# EAGLE board Rocket Club Drag Flaps (EAGLE 7.5.0)
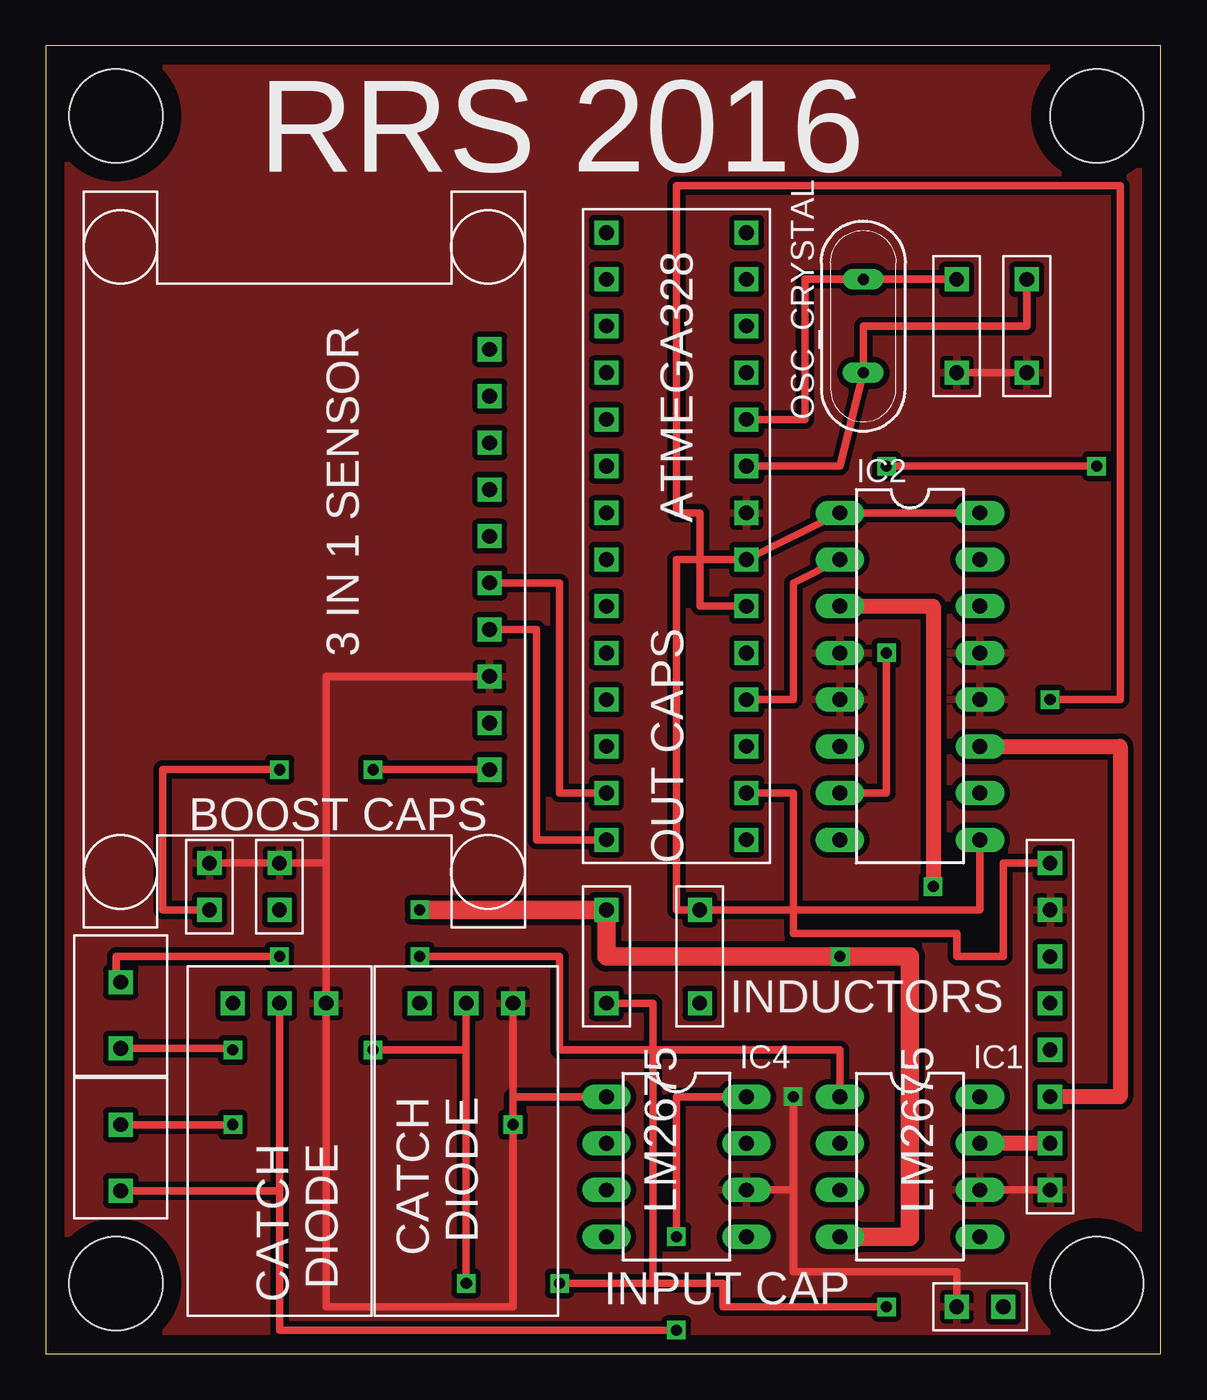
[diagram p0: board, top side]
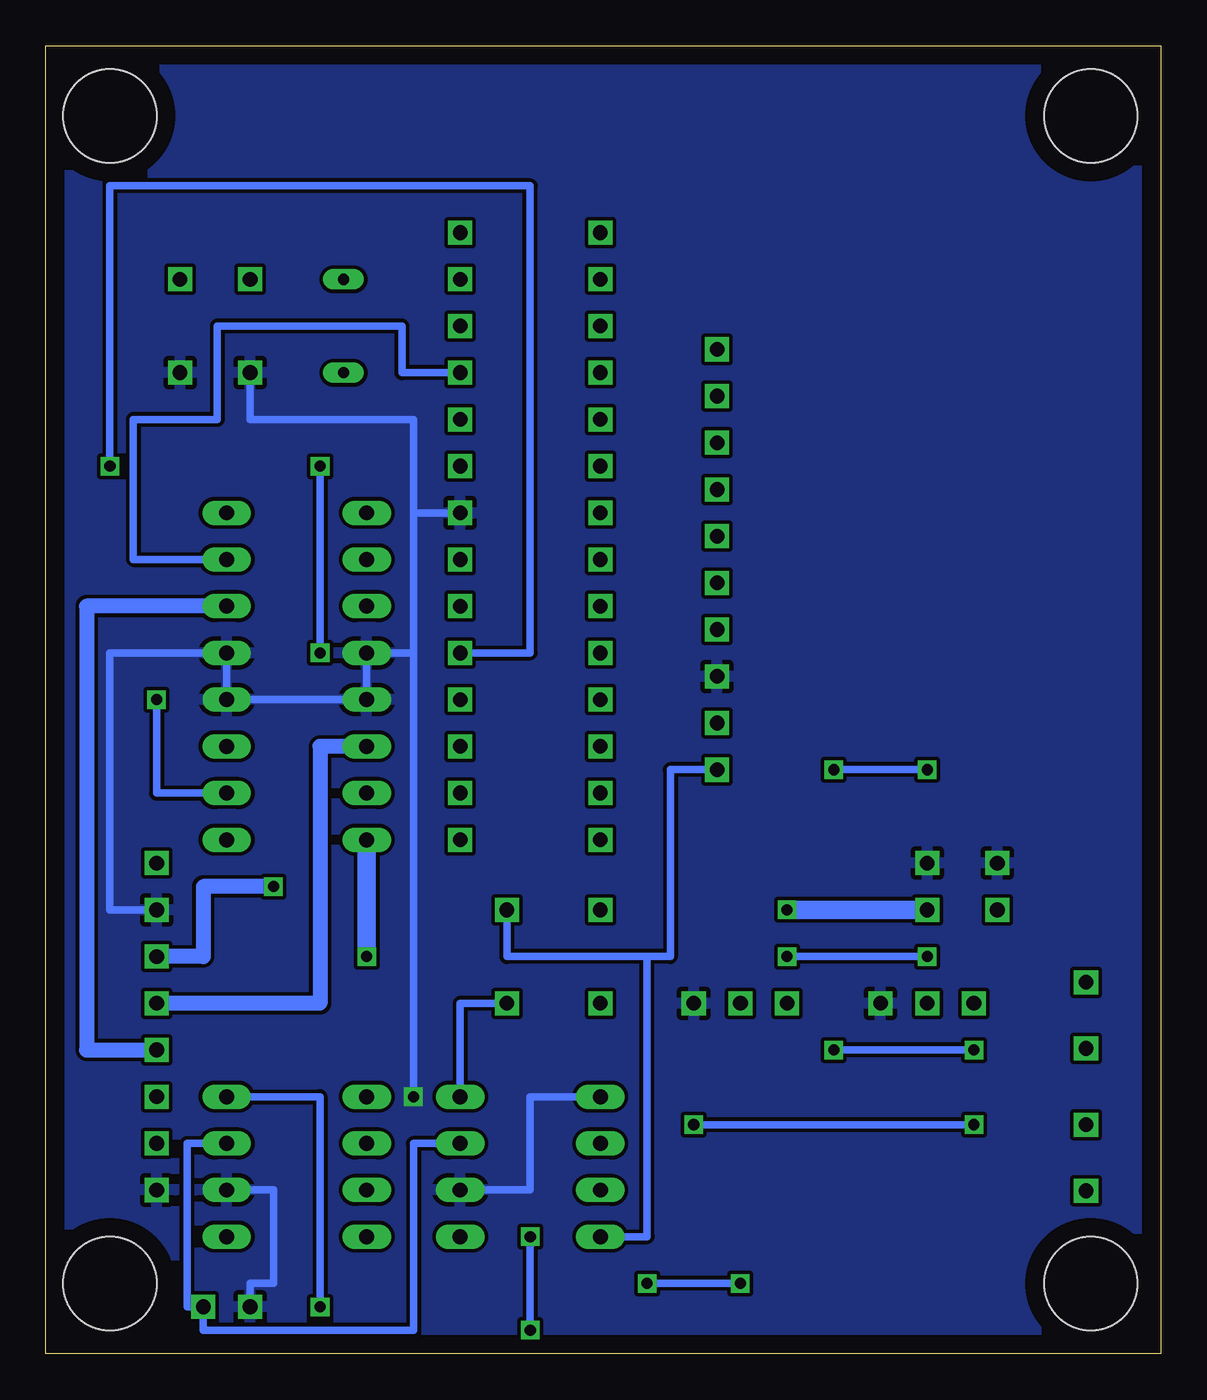
[diagram p1: board, bottom side, seen from below]

Size 60.63 x 71.11 mm. Coordinates in mm from the lower left corner, seen from the top.
Outline: 0,0 60.63,0 60.63,71.11 0,71.11 0,0
Copper layers (1*16): Top 0.035mm / dielectric 1.5mm / Bottom 0.035mm
Design rules "default": minimum track width 10mil, minimum drill 24mil, track to track 8mil, track to pad 8mil, pad to pad 8mil, via to via 8mil, smd to smd 8mil, copper to edge 40mil, drill to drill 8mil, minimum pad ring 10mil, minimum via ring 8mil, stop-mask expansion 4mil, vias tented up to drill 0mil, thermal gap 10mil
Holes 5.08 mm at 3.81,67.31 57.15,67.31 57.15,3.81 3.81,3.81

## Footprints (pad centres in the part's own frame; a part is rotated, then mirrored left to right if it is on the bottom)
BOOST_CAP = drill 0.8 square: P$1 0,0; P$2 0,-3.592
CATCH_DIODOE = drill 0.8 square: P$1 0,2.54; P$2 0,0; P$3 0,-2.54
DIL08 = drill 0.813 long: 1 -3.81,-3.81; 2 -1.27,-3.81; 3 1.27,-3.81; 4 3.81,-3.81; 5 3.81,3.81; 6 1.27,3.81; 7 -1.27,3.81; 8 -3.81,3.81
DIL16 = drill 0.813 long: 1 -8.89,-3.81; 2 -6.35,-3.81; 3 -3.81,-3.81; 4 -1.27,-3.81; 5 1.27,-3.81; 6 3.81,-3.81; 7 6.35,-3.81; 8 8.89,-3.81; 9 8.89,3.81; 10 6.35,3.81; 11 3.81,3.81; 12 1.27,3.81; 13 -1.27,3.81; 14 -3.81,3.81; 15 -6.35,3.81; 16 -8.89,3.81
AXIAL_2 = drill 0.8 square: P$1 -2.54,0; P$2 2.54,0
QS = drill 0.61 long: 1 -2.54,0; 2 2.54,0
SCREW_ONESIDE = drill 0.8 square: P$1 0,0; P$2 0,-2.54; P$3 0,-5.08; P$4 0,-7.62; P$5 0,-10.16; P$6 0,-12.7; P$7 0,-15.24; P$8 0,-17.78
LSM303DLHC/LSGD20H/BMP180 = drill 0.8 square: 3VO -8.89,-5.08; GINT 1.27,-5.08; GND -6.35,-5.08; GRDY 3.81,-5.08; LIN1 6.35,-5.08; LIN2 8.89,-5.08; LRDY 11.43,-5.08; SCL -3.81,-5.08; SDA -1.27,-5.08; VIN -11.43,-5.08
ATMEGA328 = drill 0.8 square: 0_RX 0,-2.54; 1_TX 0,-5.08; 2 0,-7.62; 3 0,-10.16; 4 0,-12.7; 5 0,-25.4; 6 0,-27.94; 7 0,-30.48; 8 0,-33.02; 9 7.62,-33.02; 10_SS 7.62,-30.48; 11_MOSI 7.62,-27.94; 12_MISO 7.62,-25.4; 13_SCK 7.62,-22.86; A0 7.62,-12.7; A1 7.62,-10.16; A2 7.62,-7.62; A3 7.62,-5.08; AREF 7.62,-17.78; GND 0,-17.78; GND_2 7.62,-15.24; OSC1 0,-20.32; OSC2 0,-22.86; RESET 0,0; SCL 7.62,0; SDA 7.62,-2.54; VCC 0,-15.24; VCC_2 7.62,-20.32
AXIAL_2_REAL = drill 0.8 square: P$1 -1.27,0; P$2 1.27,0

## Placement (x,y rotation side)
BOOST_CAP_1  10nF  [BOOST_CAP]  4.06,12.45 0 top
BOOST_CAP_2  10nF  [BOOST_CAP]  4.06,20.19 0 top
CATCH_DIODE_1  CATCH_DIODE  [CATCH_DIODOE]  12.7,19.05 90 top
CATCH_DIODE_2  CATCH_DIODE  [CATCH_DIODOE]  22.86,19.05 90 top
IC1  [DIL08]  46.99,10.16 270 top
IC2  [DIL16]  46.99,36.83 270 top
IC4  [DIL08]  34.29,10.16 270 top
OSC_CAP_0  22pF  [AXIAL_2]  49.53,55.88 270 top
OSC_CAP_1  22pF  [AXIAL_2]  53.34,55.88 270 top
OSC_CRYSTAL  16MHz  [QS]  44.45,55.88 90 top
U$1  SCREW_ONESIDE  [SCREW_ONESIDE]  54.61,26.67 0 top
U$2  AXIAL_3  [AXIAL_2]  35.56,21.59 270 top
U$3  LSM303DLHC/LSGD20H/BMP180  [LSM303DLHC/LSGD20H/BMP180]  19.05,43.18 90 top
U$4  ATMEGA328  [ATMEGA328]  38.1,27.94 180 top
U$5  AXIAL_2  [AXIAL_2_REAL]  8.89,25.4 90 top
U$6  AXIAL_2  [AXIAL_2_REAL]  12.7,25.4 90 top
U$7  AXIAL_3  [AXIAL_2]  30.48,21.59 270 top
VIN_CAP1  330 uF  [AXIAL_2_REAL]  50.8,2.54 0 top

## Library data of the parts
BOOST_CAP_1 BOOST_CAP_2 CATCH_DIODE_1 CATCH_DIODE_2 OSC_CAP_0 OSC_CAP_1 U$1-U$7 VIN_CAP1 = ROCKET CLUB
IC1 IC2 IC4 = ic-package
OSC_CRYSTAL = special

## Nets
GND: CATCH_DIODE_1.P$3 CATCH_DIODE_2.P$3 IC1.6 IC2.4 IC2.5 IC2.12 IC2.13 IC4.6 OSC_CAP_0.P$2 OSC_CAP_1.P$2 U$1.P$2 U$1.P$8 U$3.GND U$4.GND U$5.P$2 U$6.P$2 VIN_CAP1.P$1
N$1: U$3.SCL U$4.SCL
N$2: U$3.SDA U$4.SDA
N$3: OSC_CAP_0.P$1 OSC_CRYSTAL.2 U$4.OSC2
N$4: OSC_CAP_1.P$1 OSC_CRYSTAL.1 U$4.OSC1
N$5: IC2.1 IC2.9 IC2.16 IC4.4 U$2.P$1 U$3.VIN U$4.VCC U$5.P$1
N$6: IC1.4 IC2.8 U$6.P$1 U$7.P$1
N$7: IC2.2 U$4.2
N$8: IC2.7 U$4.3
N$9: BOOST_CAP_1.P$2 CATCH_DIODE_1.P$2 IC4.8 U$2.P$2
N$10: BOOST_CAP_1.P$1 IC4.1
N$11: IC1.7 IC4.7 U$1.P$7 VIN_CAP1.P$2
N$12: U$1.P$1 U$4.0_RX
N$13: BOOST_CAP_2.P$2 CATCH_DIODE_2.P$2 IC1.8 U$7.P$2
N$14: BOOST_CAP_2.P$1 IC1.1
N$15: IC2.10 U$4.4
N$16: IC2.15 U$4.5
N$18: IC2.11 U$1.P$6
N$19: IC2.14 U$1.P$5
N$20: IC2.6 U$1.P$4
N$21: IC2.3 U$1.P$3

## Tracks (layer width: path | path; a pad name or v marks a point on that pad's centre or on a via)
GND  (via drill 0.6)
  Top 0.406: U$3.GND 15.24,36.83 15.24,26.67 | 15.24,26.67 CATCH_DIODE_1.P$3 15.24,2.54 25.4,2.54 25.4,13.97 | U$5.P$2 U$6.P$2 15.24,26.67 | 25.4,13.97 CATCH_DIODE_2.P$3 | 25.4,13.97 v30.48,13.97 | v40.64,13.97 40.64,8.89 | 40.64,8.89 IC4.6 | OSC_CAP_0.P$2 OSC_CAP_1.P$2 | 40.64,8.89 40.64,4.45 49.53,4.45 VIN_CAP1.P$1 | U$1.P$8 IC1.6
  Bottom 0.406: v30.48,13.97 34.29,13.97 34.29,8.89 IC4.6 | U$4.GND 40.64,45.72 | 40.64,45.72 40.64,38.1 | 40.64,38.1 v40.64,13.97 | 40.64,45.72 40.64,50.8 49.53,50.8 OSC_CAP_0.P$2 | 40.64,38.1 IC2.4 IC2.5 IC2.12 IC2.13 57.15,38.1 57.15,24.13 U$1.P$2 | IC1.6 48.26,8.89 48.26,3.81 49.53,3.81 VIN_CAP1.P$1
  pour Top (isolate 0.305): 0,0 0,71.12 60.96,71.12 60.96,0
  pour Bottom: 0,0 0,71.12 60.96,71.12 60.96,0
N$1
  Top 0.406: U$4.SCL 26.67,27.94 26.67,39.37 U$3.SCL
N$2
  Top 0.406: U$3.SDA 27.94,41.91 27.94,30.48 U$4.SDA
N$3
  Top 0.406: OSC_CAP_0.P$1 OSC_CRYSTAL.2 41.27,58.42 41.27,50.8 U$4.OSC2
N$4
  Top 0.406: U$4.OSC1 43.18,48.26 OSC_CRYSTAL.1 44.45,55.88 53.34,55.88 OSC_CAP_1.P$1
N$5  (via drill 0.6)
  Top 0.406: U$5.P$1 6.35,24.13 6.35,31.75 v12.7,31.75 | v17.78,31.75 U$3.VIN | IC2.16 IC2.1 U$4.VCC 34.29,43.18 34.29,24.13 U$2.P$1 50.8,24.13 IC2.9
  Bottom 0.406: v12.7,31.75 v17.78,31.75 | IC4.4 27.94,6.35 27.94,21.59 | 27.94,21.59 35.56,21.59 U$2.P$1 | U$3.VIN 26.67,31.75 26.67,21.59 27.94,21.59
N$6  (via drill 0.6)
  Top 1.016: v20.32,24.13 U$7.P$1 30.48,21.59 v43.18,21.59 46.99,21.59 46.99,6.35 IC1.4
  Bottom 1.016: U$6.P$1 v20.32,24.13 | IC2.8 v43.18,21.59
N$7
  Top 0.406: U$4.2 40.64,35.56 40.64,41.91 IC2.2
N$8  (via drill 0.6)
  Top 0.406: v57.15,48.26 v45.72,48.26 | v45.72,38.1 45.72,30.48 IC2.7
  Bottom 0.406: U$4.3 34.29,38.1 34.29,63.5 57.15,63.5 v57.15,48.26 | v45.72,48.26 v45.72,38.1
N$9  (via drill 0.6)
  Top 0.406: CATCH_DIODE_1.P$2 12.7,8.85 | 12.7,8.85 12.7,1.27 v34.29,1.27 | BOOST_CAP_1.P$2 12.7,8.85 | IC4.8 34.29,13.97 v34.29,6.35
  Bottom 0.406: v34.29,6.35 v34.29,1.27 | U$2.P$2 38.1,19.05 IC4.8
N$10  (via drill 0.61)
  Top 0.406: BOOST_CAP_1.P$1 v10.16,12.45 | IC4.1 25.4,13.97 v25.4,12.45
  Bottom 0.406: v10.16,12.45 v25.4,12.45
N$11
  Top 0.813: U$1.P$7 IC1.7
  Bottom 0.406: IC4.7 40.64,11.43 40.64,1.27 52.07,1.27 VIN_CAP1.P$2 52.96,2.54 52.96,11.43 IC1.7
N$12
  Top 0.406: U$1.P$1 52.07,26.67 52.07,21.59 49.53,21.59 49.53,22.86 40.64,22.86 40.64,30.48 U$4.0_RX
N$13  (via drill 0.6)
  Top 0.406: BOOST_CAP_2.P$2 10.16,16.6 v10.16,16.51 | v17.78,16.51 22.86,16.51 CATCH_DIODE_2.P$2 v22.86,3.81 | v27.94,3.81 33.02,3.81 | v45.72,2.54 36.83,2.54 36.83,3.81 33.02,3.81 | U$7.P$2 33.02,19.05 33.02,3.81
  Bottom 0.406: v10.16,16.51 v17.78,16.51 | v22.86,3.81 v27.94,3.81 | IC1.8 45.72,13.97 v45.72,2.54
N$14  (via drill 0.6)
  Top 0.406: BOOST_CAP_2.P$1 3.81,20.19 3.81,21.59 v12.7,21.59 | v20.32,21.59 27.94,21.59 27.94,16.51 43.18,16.51 IC1.1
  Bottom 0.406: v12.7,21.59 v20.32,21.59
N$15  (via drill 0.6)
  Top 0.406: U$4.4 35.56,40.64 35.56,45.72 34.29,45.72 34.29,63.5 58.42,63.5 58.42,35.56 v54.61,35.56
  Bottom 0.406: v54.61,35.56 54.61,30.48 IC2.10
N$16
  Bottom 0.406: U$4.5 41.27,53.34 41.27,55.88 51.31,55.88 51.31,50.8 55.88,50.8 55.88,43.18 IC2.15
N$18
  Top 0.813: IC2.11 58.42,33.02 58.42,13.97 U$1.P$6
N$19
  Bottom 0.813: IC2.14 58.42,40.64 58.42,16.51 U$1.P$5
N$20
  Bottom 0.813: IC2.6 45.72,33.02 45.72,19.05 U$1.P$4
N$21  (via drill 0.6)
  Top 0.813: IC2.3 48.26,40.64 v48.26,25.4
  Bottom 0.813: v48.26,25.4 52.07,25.4 52.07,21.59 U$1.P$3

## Text on the board
tNames: RRS 2016 | ATMEGA328 | 3 IN 1 SENSOR | BOOST CAPS | OUT CAPS | INDUCTORS | CATCH / DIODE | CATCH / DIODE | LM2675 | LM2675 | INPUT CAP